# Altium PCB 锁生活(1.0mm).PcbDoc
Units mm, origin at the board's own origin, x right, y up, seen from the top; angles counter-clockwise.
Board outline 45 x 80 mm, 2 copper layers (Top Layer, Bottom Layer), stack 0.98 mm thick; 54 components, 35 nets, 172 pads, 102 vias.
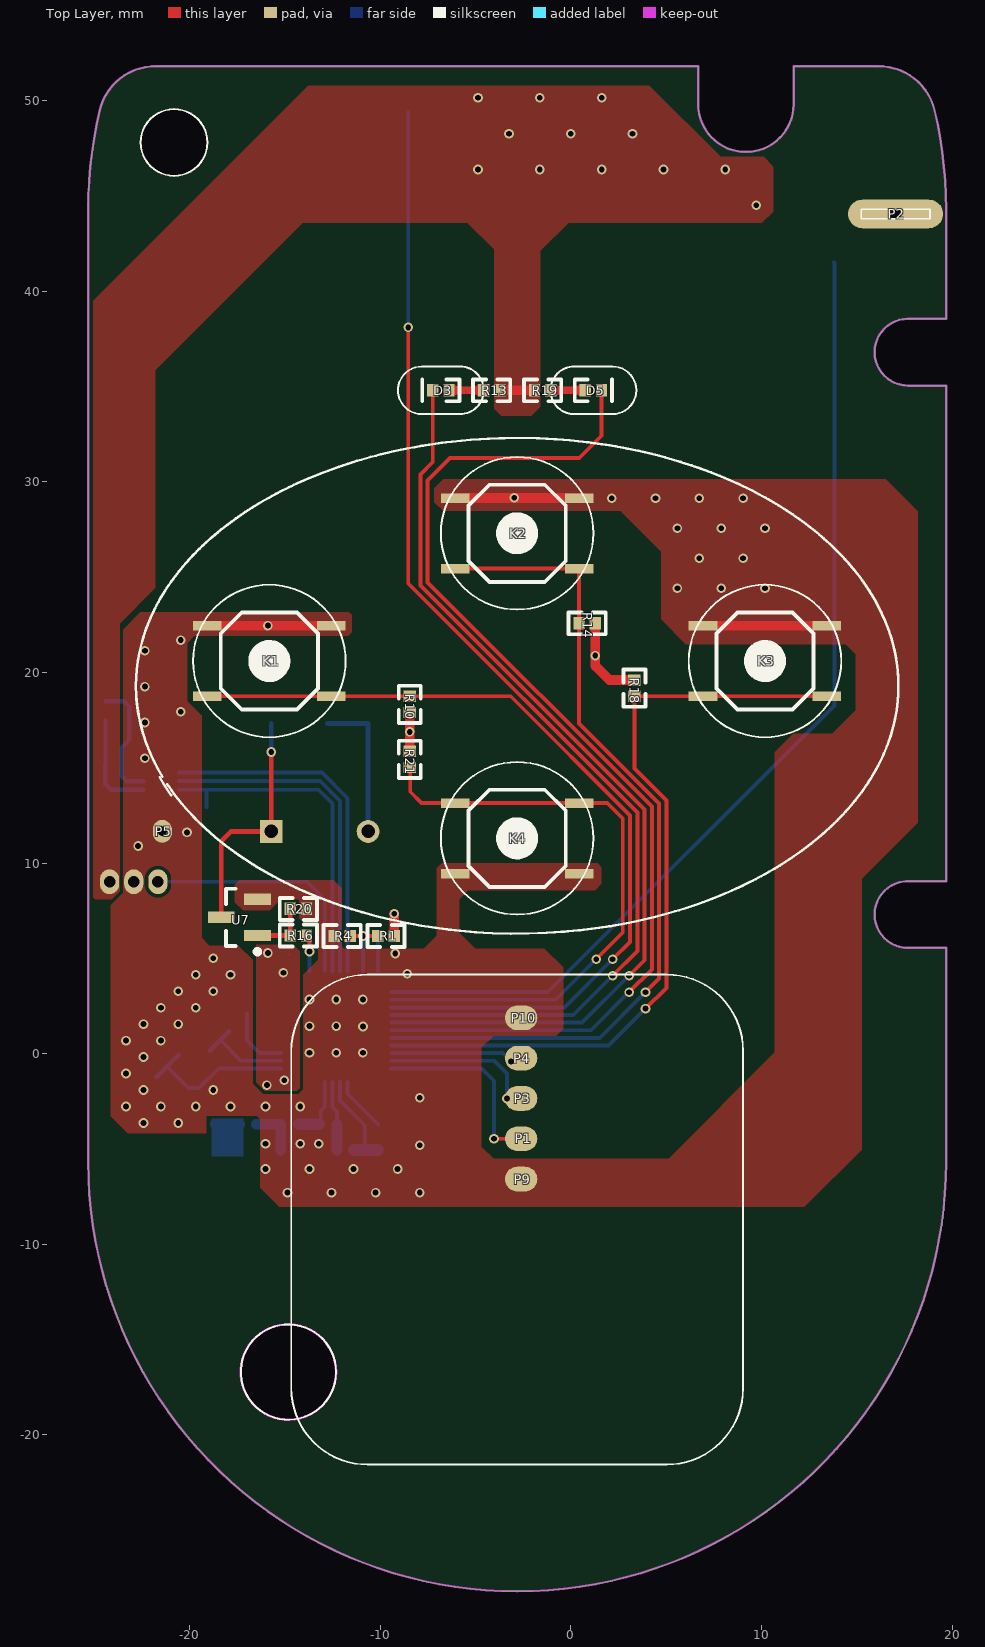
[diagram p0: Top Layer view]
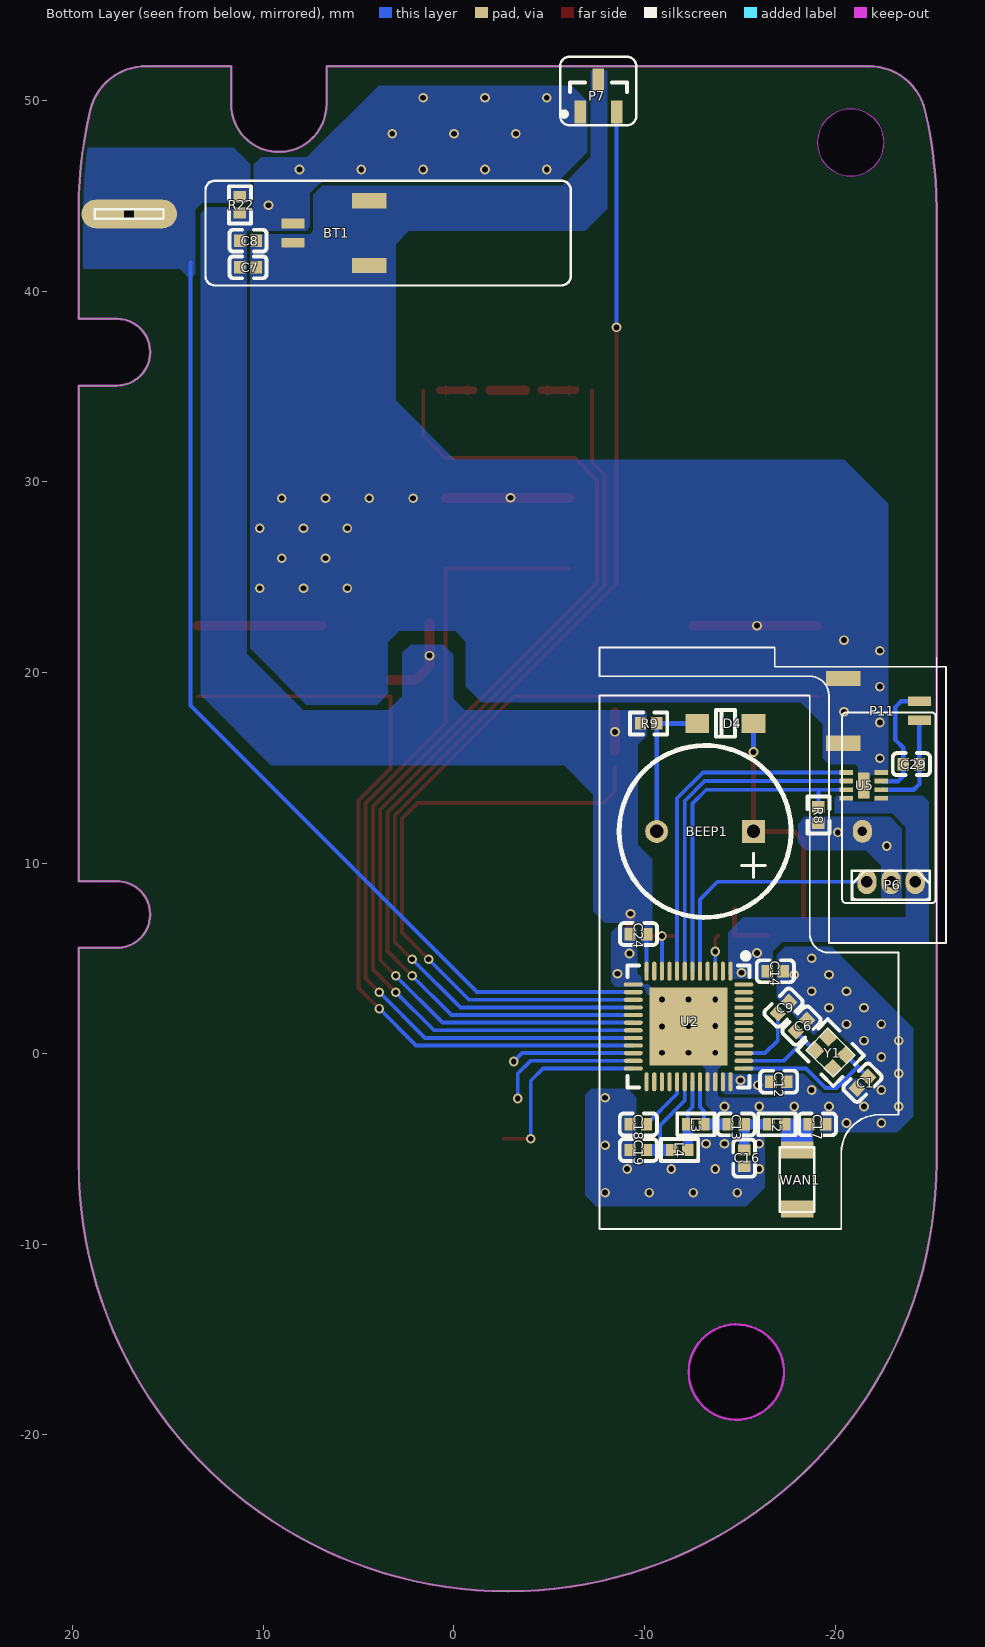
[diagram p1: Bottom Layer view, seen from below]
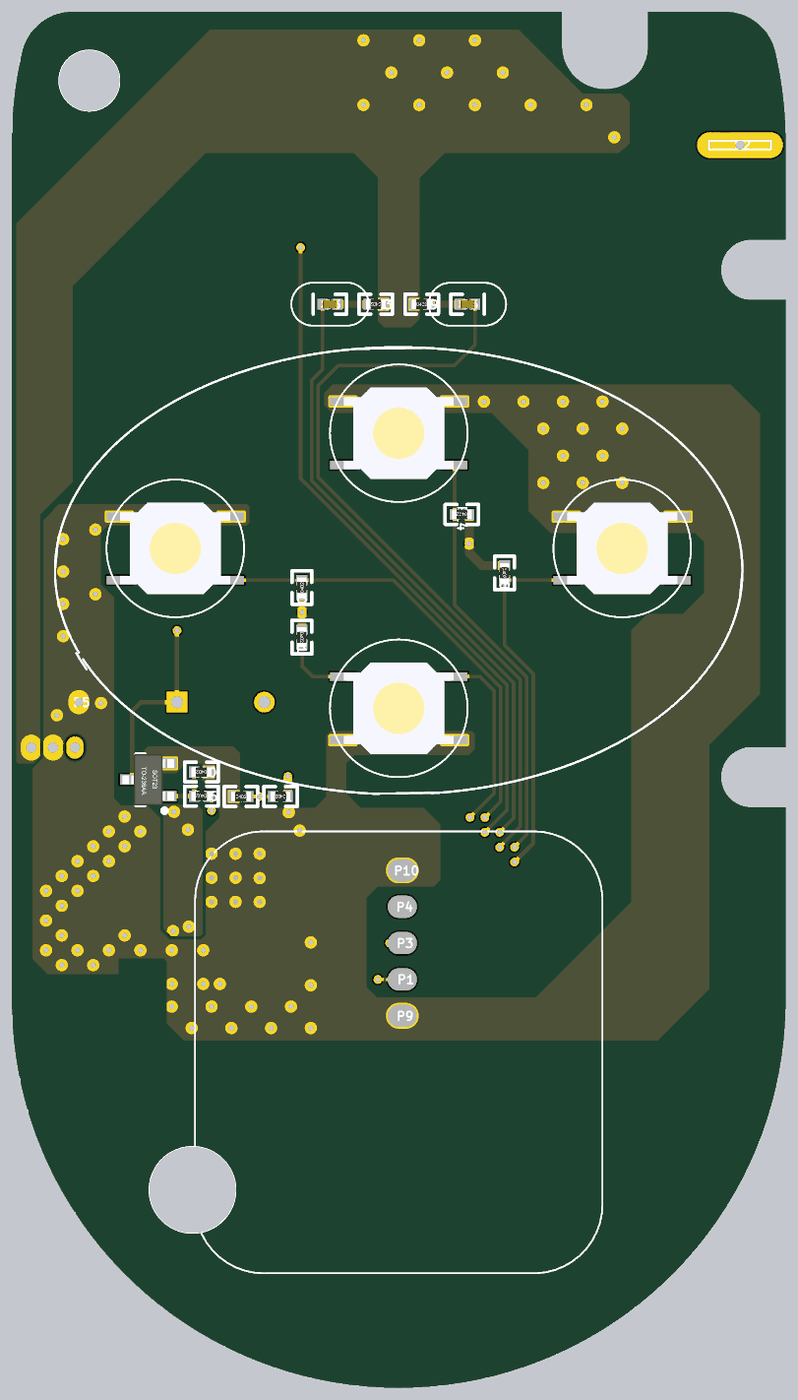
[diagram p2: 3D render of the assembled board from above, using the file's embedded part models]
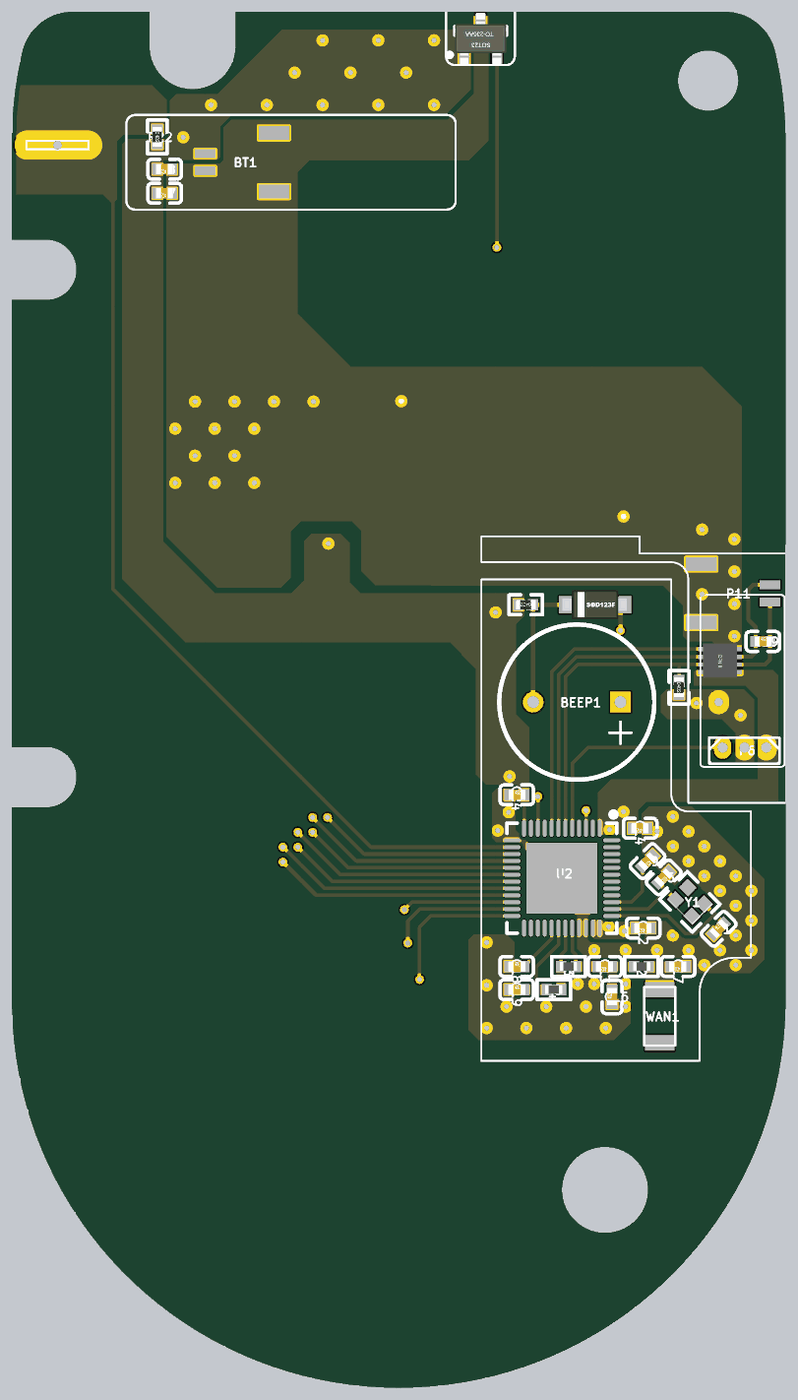
[diagram p3: 3D render of the assembled board from below, using the file's embedded part models]

## Layer stack, top to bottom
Top Solder: solder mask 0.0102, Solder Resist, Dk 3.5
Top Layer: signal copper 0.0356
Dielectric 1: dielectric 0.9086, FR-4, Dk 4.8
Bottom Layer: signal copper 0.0356
Bottom Solder: solder mask 0.0102, Solder Resist, Dk 3.5

## Board outline
-25.324,-5.702 -25.324,44.298 cw(c-2.824,44.298) -24.716,49.49 cw(c-21.797,48.798) -21.797,51.798 6.676,51.798 6.676,49.798 ccw(c9.176,49.798) 11.676,49.798 11.676,51.798 16.15,51.798 cw(c16.15,48.798) 19.069,49.49 cw(c-2.824,44.298) 19.676,44.298 19.676,38.548 17.676,38.548 ccw(c17.676,36.798) 17.676,35.048 19.676,35.048 19.676,9.048 17.676,9.048 ccw(c17.676,7.298) 17.676,5.548 19.676,5.548 19.676,-5.702 cw(c-2.824,-5.702)
cut-out: -14.824,-19.202 cw(c-14.824,-16.702) -17.324,-16.702 cw(c-14.824,-16.702) -14.824,-14.202 cw(c-14.824,-16.702) -12.324,-16.702 cw(c-14.824,-16.702)
cut-out: -20.824,46.048 cw(c-20.824,47.798) -22.574,47.798 cw(c-20.824,47.798) -20.824,49.548 cw(c-20.824,47.798) -19.074,47.798 cw(c-20.824,47.798)

## Design rules (kind name [scope] priority, off if disabled: settings)
Clearance [All] p1: gap=0.178 ignorepadtopadclearanceinfootprint=FALSE
PolygonConnect [All] p1: connectstyle=Direct reliefconductorwidth=0.254 reliefentries=4 polygonreliefangle="90 Angle" airgapwidth=0.254
RoutingVias [All] p1: holewidth=0.711 width=1.27 viastyle="Through Hole" minholewidth=0.711 minwidth=1.27 maxholewidth=0.711 maxwidth=1.27
SolderMaskExpansion [All] p1: expansion=0.102
Width [All] p1: maxlimit=1.27 minlimit=0.203 preferedwidth=0.254
30 further rules are at their usual default settings.

## Components (designator, comment, footprint, x,y, rotation, side; value= is the part's Value field where it differs from the comment)
BEEP1 "BEEP" BELL-φ5 -13.183,11.659 r0 bottom
BT1 "BATTERY" 2P-1.0卧贴连接器 8.433,43.548 r270 bottom
C1 "6pF" 0402_C -21.438,-1.524 r135 bottom
C6 "6pF" 0402_C -18.237,1.473 r315 bottom
C7 "10uF" 0402_C 10.795,41.25 r0 bottom
C8 "100nF" 0402_C 10.795,42.647 r0 bottom
C9 "100nF" 0402_C -17.297,2.413 r315 bottom
C12 "100nF" 0402_C -17.043,-1.473 r0 bottom
C13 "2.2pF" 0402_C -14.808,-3.708 r0 bottom
C14 "100nF" 0402_C -16.866,4.325 r0 bottom
C16 "0.8pF" 0402_C -15.233,-5.48 r90 bottom
C17 "1.5pF" 0402_C -19.075,-3.708 r0 bottom
C18 "47nF" 0402_C -9.684,-3.708 r180 bottom
C19 "2.2nF" 0402_C -9.684,-5.055 r180 bottom
C24 "100nF" 0402_C -9.69,6.274 r180 bottom
C29 "10uF" LC-0402_C -24.003,15.189 r180 bottom
D3 "BLUE-LED" 0402_LED -6.824,34.798 r0 top
D4 "Diode" SOD-123F -14.248,17.323 r180 bottom
D5 "RED-LED" 0402_LED 1.176,34.798 r180 top
K1 "KEY" KEY_SMT4x4x1.5 -15.824,20.598 r180 top
K2 "KEY" KEY_SMT4x4x1.5 -2.824,27.298 r180 top
K3 "KEY" KEY_SMT4x4x1.5 10.176,20.598 r180 top
K4 "KEY" KEY_SMT4x4x1.5 -2.824,11.298 r0 top
L2 "3.3nH" 0402_L -16.942,-3.708 r180 bottom
L3 "5.6nH" 0402_L -12.7,-3.708 r0 bottom
L4 "10nH" 0402_L -11.85,-5.055 r0 bottom
P1 "SWDCLK" 1P#1 -2.616,-4.464 r270 top
P2 "KEY5" 1P#2 17.026,44.048 r180 top
P3 "SWDIO" 1P#1 -2.616,-2.349 r270 top
P4 "RX" 1P#3 -2.616,-0.235 r180 top
P5 "GND" 1P#4 -21.436,11.661 r0 top
P6 "Holzer" Holzer -21.666,9.017 r180 bottom
P7 "Holzer" SOT23-3#1 -7.588,50.241 r90 bottom
P9 "GND" 1P#3 -2.616,-6.579 r180 top
P10 "GND" 1P#1 -2.616,1.88 r90 top
P11 "Motor" 2P-1.0卧贴连接器 -24.422,17.485 r90 bottom
R1 "100K" 0402_R -9.703,6.172 r180 top
R4 "100K" 0402_R -12.002,6.172 r0 top
R8 "10K" LC-0402_R -19.126,12.522 r270 bottom
R9 "30R" 0402_R -10.218,17.323 r0 bottom
R10 "10K" LC-0402_R -8.458,18.323 r90 top
R13 "510R" LC-0402_R -4.157,34.798 r180 top
R14 "10K" LC-0402_R 0.851,22.574 r180 top
R16 "1K" 0402_R -14.3,6.198 r180 top
R18 "10K" LC-0402_R 3.327,19.173 r270 top
R19 "510R" LC-0402_R -1.49,34.798 r0 top
R20 "10K" 0402_R -14.3,7.595 r180 top
R21 "10K" LC-0402_R -8.458,15.436 r270 top
R22 "10K" LC-0402_R 11.22,44.526 r270 bottom
U2 "nRF51822-QFAA" QFN-48_6x6x04P -12.315,1.425 r0 bottom
U5 "TT6238" DFN-8(2*2) -21.503,14.072 r0 bottom
U7 "N_MOS" SOT23-3#2 -17.399,7.148 r180 top
WAN1 "陶瓷天线" 陶瓷天线 -18.009,-6.605 r90 bottom
Y1 "32M" XT-2016 -19.761,0.051 r225 bottom

## Footprints (in the part's own frame and the unit in brackets; to place one, negate y for a bottom-side part, rotate by r counter-clockwise, add the part's x,y. Pads: shape width x height; smd on the part's side, far side on the other; paste and mask are expansions set on the pad)
1P#1 [mm] "single pad"
  oval 1.3x1.7 smd: 1(0,0)
1P#2 [mm] "single pad"
  oval 5x1.5 hole 0.5 square: 1(0,0)
1P#3 [mm] "single pad"
  oval 1.7x1.3 smd: 1(0,0)
1P#4 [mm] "single pad"
  oval 1x1.2 hole 0.5: 1(0,0)
2P-1.0卧贴连接器 [mm]
  rect 0.8x1.8 smd: 0(-1.2,4) 0(2.2,4)
  rect 0.5x1.2 smd: 1(0,0) 2(1,0)
0402_C [mm]
  rect 0.6x0.65 smd mask+0.051: 1(-0.425,0) 2(0.425,0)
  silkscreen extent -0.98,-0.58 0.97,0.58, body extent -0.48,-0.3 0.52,0.3, height 0.2
0402_L [mm]
  rect 0.6x0.65 smd mask+0.051: 1(-0.425,0) 2(0.425,0)
  silkscreen extent -0.98,-0.58 0.97,0.58, body extent -0.49,-0.26 0.52,0.26, height 0.36
0402_LED [mm]
  rect 0.6x0.65 smd mask+0.051: A(0.425,0) K(-0.425,0)
  silkscreen extent -0.98,-0.58 0.97,0.57, body extent -0.5,-0.25 0.5,0.25, height 0.45
0402_R [mm]
  rect 0.6x0.65 smd mask+0.051: 1(-0.425,0) 2(0.425,0)
  silkscreen extent -0.97,-0.58 0.97,0.57, body extent -0.57,-0.27 0.57,0.28, height 0.41
BELL-φ5 [mm]
  rect 1.2x1.2 hole 0.7: 1(-2.54,0)
  round 1.2 hole 0.7: 2(2.54,0)
  silkscreen extent -4.51,-4.51 4.51,4.51, body extent -4.53,-4.43 4.53,4.63, height 5
DFN-8(2*2) [mm]
  rect 0.7x0.25 smd paste+0: 1(-0.925,0.675) 2(-0.925,0.225) 3(-0.925,-0.225) 4(-0.925,-0.675) 5(0.925,-0.675) 6(0.925,-0.225) 7(0.925,0.225) 8(0.925,0.675)
  rect 0.61x1.35 smd paste+0: 4(-0.011,0)
  body extent -1.01,-1 0.99,1, height 0.75
Holzer [mm]
  oval 1x1.3 hole 0.6 paste+0: 1(2.54,0) 2(0,0) 3(1.27,0)
  silkscreen extent -0.78,-0.93 3.31,0.59, body extent -0.78,-1 3.31,0.52, height 4.57
KEY_SMT4x4x1.5 [mm]
  rect 1.5x0.5 smd: 1(-3.25,1.85) 1(3.25,1.85) 2(-3.25,-1.85) 2(3.25,-1.85)
  silkscreen extent -2.55,-2.55 2.55,2.55, body extent -3.2,-2.65 3.2,2.65, height 1.5
LC-0402_C [mm]
  rect 0.6x0.65 smd mask+0.051: 1(-0.425,0) 2(0.425,0)
  silkscreen extent -0.98,-0.58 0.97,0.58, body extent -0.48,-0.3 0.52,0.3, height 0.2
LC-0402_R [mm]
  rect 0.6x0.65 smd mask+0.051: 1(-0.425,0) 2(0.425,0)
  silkscreen extent -0.97,-0.58 0.97,0.57, body extent -0.57,-0.27 0.58,0.28, height 0.41
QFN-48_6x6x04P [mm]
  oval 0.22x1 smd mask+0.051: 1(-2.2,-2.9) 2(-1.8,-2.9) 3(-1.4,-2.9) 4(-1,-2.9) 5(-0.6,-2.9) 6(-0.2,-2.9) 7(0.2,-2.9) 8(0.6,-2.9) 9(1,-2.9) 10(1.4,-2.9) 11(1.8,-2.9) 12(2.2,-2.9) 25(2.2,2.9) 26(1.8,2.9) 27(1.4,2.9) 28(1,2.9) 29(0.6,2.9) 30(0.2,2.9) 31(-0.2,2.9) 32(-0.6,2.9) 33(-1,2.9) 34(-1.4,2.9) 35(-1.8,2.9) 36(-2.2,2.9)
  oval 1x0.22 smd mask+0.051: 13(2.9,-2.2) 14(2.9,-1.8) 15(2.9,-1.4) 16(2.9,-1) 17(2.9,-0.6) 18(2.9,-0.2) 19(2.9,0.2) 20(2.9,0.6) 21(2.9,1) 22(2.9,1.4) 23(2.9,1.8) 24(2.9,2.2) 37(-2.9,2.2) 38(-2.9,1.8) 39(-2.9,1.4) 40(-2.9,1) 41(-2.9,0.6) 42(-2.9,0.2) 43(-2.9,-0.2) 44(-2.9,-0.6) 45(-2.9,-1) 46(-2.9,-1.4) 47(-2.9,-1.8) 48(-2.9,-2.2)
  rect 4.1x4.1 smd mask+0.051: 49(0,0)
  silkscreen extent -3.2,-3.85 3.2,3.2, body extent -3.06,-3.06 3.06,3.06, height 1
SOD-123F [mm]
  rect 1.25x1 smd: 1(-1.475,0) 2(1.475,0)
  silkscreen extent -0.5,-0.7 0.5,0.7, body extent -1.9,-0.85 1.85,0.85, height 1.2
SOT23-3#1 [mm] "SOT23, 3-Leads, Body 3.0x2.5mm (max), Pitch 0.95mm, IPC Medium Density"
  rect 1.2x0.6 smd: 1(-0.85,0.95) 2(-0.85,-0.95) 3(0.85,0)
  silkscreen extent -1.07,-1.5 0.7,1.93, body extent -1.5,-1.5 1.5,1.5, height 1.3
SOT23-3#2 [mm] "SOT23, 3-Leads, Body 3.0x2.5mm (max), Pitch 0.95mm, IPC Medium Density"
  rect 1.4x0.6 smd: 1(-0.95,0.95) 2(-0.95,-0.95) 3(0.95,0)
  silkscreen extent -1.08,-1.5 0.7,1.92, body extent -1.5,-1.5 1.5,1.5, height 1.3
XT-2016 [mm]
  rect 0.75x0.7 smd: 1(-0.675,-0.5) 2(0.675,0.5) 3(0.675,-0.5) 4(-0.675,0.5)
  silkscreen extent -1.35,-1.14 1.35,1.14, body extent -1,-0.8 1,0.8, height 0.65
陶瓷天线 [mm]
  rect 0.9x1.7 smd: 1(1.55,0) 2(-1.55,0)
  silkscreen extent -1.7,-0.9 1.7,0.9, body extent -1.7,-0.9 1.7,0.9, height 1.4

## Part data
BEEP1: "蜂鸣器"
BT1: "电池"
C1 C6 C7 C8 C9 C12 C13 C14 C16 C17 C18 C19 C24 C29: library part Cap, "Capacitor", LatestRevisionDate=17-Jul-2002, LatestRevisionNote="Re-released for DXP Platform.", PackageDescription="Radial Cap, Thru-Hole; 2 Leads; 0.3 in Pin Spacing", PackageReference=RAD-0.3, Published=8-Jun-2000, Publisher="Altium Limited"
D3 D5: library part LED, "Typical RED, GREEN, YELLOW, AMBER GaAs LED", PackageDocument=Feb-2002, LatestRevisionDate=17-Jul-2002, LatestRevisionNote="Re-released for DXP Platform.", PackageReference=3.2X1.6X1.1, Published=8-Jun-2000, Publisher="Altium Limited"
D4: "diode", PackageDocument=Feb-2002, LatestRevisionDate=17-Jul-2002, LatestRevisionNote="Re-released for DXP Platform.", PackageReference=3.2X1.6X1.1, Published=8-Jun-2000, Publisher="Altium Limited"
L2 L3 L4: library part L
P1 P2 P3 P4 P5 P9 P10: library part "Header 1", "Header, 1-Pin", LatestRevisionDate=17-Jul-2002, LatestRevisionNote="Re-released for DXP Platform.", Publisher="Altium Limited"
P11: "电机"
R1 R4 R8 R9 R10 R13 R14 R16 R18 R19 R20 R21 R22: library part Res, "Resistor", LatestRevisionDate=17-Jul-2002, LatestRevisionNote="Re-released for DXP Platform.", PackageDescription="Axial Device, Thru-Hole; 2 Leads; 0.4 in Pin Spacing", PackageReference=AXIAL-0.4, Published=8-Jun-2000, Publisher="Altium Limited"
U2: "Multi-protocol Bluetooth Low Energy and 2.4GHz proprietary system-on-chip", Manufacturer="Nordic Semiconductor", Part Number=nRF51822-Q48-6x6_DCDC, Artikkelnr Noca=15079200, LatestRevisionDate=2012-07-10, Manufacturer Part Number=nRF51822-QFAA, Note="nRF51822 - QFN48 6x6 0.4mm pitch", Pin Count=48, Published=2012-07-08, Publisher="Nordic Semiconductor", Supplier="Nordic Semiconductor"
U5: library part TT6237
Y1: library part XTAL, "Crystal Oscillator", LatestRevisionDate=17-Jul-2002, LatestRevisionNote="Re-released for DXP Platform.", Published=8-Jun-2000, Publisher="Altium Limited"
P6 P7: LatestRevisionDate=17-Jul-2002, LatestRevisionNote="Re-released for DXP Platform.", Publisher="Altium Limited"

## Via types
v1: diameter 0.508, hole 0.305, Top Layer to Bottom Layer, 102 vias

## Nets (pads, with @x,y where several pads share a name; then routed paths per layer and width w, separated by ;. In a path a pad name is that pad's centre, name@x,y a point inside that pad or via, vN(x,y) a via of type N, cw(c..) or ccw(c..) an arc to the next point about the centre after c; other vN are vias at no path point)
+3V: BT1.1 C7.2 C8.2 C12.2 C14.2 C24.2 P6.1 P7.1 R1.1 R9.2 R10.1 R13.1 R14.1 R18.1 R19.1 R21.1 R22.2 U2.1 U2.12 U2.35 U2.36 U5.1 U5.8 | length 11.6
  Top Layer w0.508: R1.1 -9.271,6.179 v1(-9.271,7.341) ; R21.1 v1(-8.458,16.88) R10.1 ; R13.1 R19.1 ; R14.1 1.276,20.339 2.018,19.598 R18.1
  Bottom Layer w0.203: U2.12 C24.2
  other v1: -15.951,-1.651 -15.037,-1.397 -15.088,4.242 -15.9,5.283 1.27,20.879 9.715,44.501 -4.877,46.38 -1.634,46.38 1.609,46.38 4.851,46.38 8.094,46.38 -3.255,48.26 -0.013,48.26 3.23,48.26 -4.877,50.14 -1.634,50.14 1.609,50.14
AD_BAT: R1.2 R4.2 U2.10 | length 3.3
  Top Layer w0.203: R4.2 v1(-10.915,6.172) R1.2
  Bottom Layer w0.203: U2.10 v1(-10.915,6.172)
ANT: C17.2 L2.2 WAN1.1 | length 1.3
  Bottom Layer w0.559: C17.2 L2.2
ANT1: L3.2 L4.1 U2.31 | length 3.7
  Bottom Layer w0.203: U2.31 -12.515,-2.802 -12.275,-3.041 L3.2
  Bottom Layer w0.559: L4.1 L3.2
ANT2: C13.2 L3.1 U2.32 | length 3.3
  Bottom Layer w0.203: L3.1@-13.125,-3.625 -13.125,-3.016 -12.915,-2.805 U2.32
  Bottom Layer w0.61: C13.2@-14.275,-3.708 L3.1@-13.208,-3.708
BEEP: R16.1 U2.3 | length 1.9
  Top Layer w0.203: R16.1 -13.716,6.038 v1(-13.716,5.359)
  Bottom Layer w0.203: v1(-13.716,5.359) -13.716,4.327 U2.3
BLUE_LED: D3.K U2.18 | length 49.7
  Top Layer w0.203: D3.K -7.249,31.029 -7.899,30.378 -7.899,24.567 3.861,12.807 3.861,4.902 v1(3.048,4.089)
  Bottom Layer w0.203: U2.18 0.584,1.625 v1(3.048,4.089)
DEC1: C9.2 U2.39 | length 3.5
  Bottom Layer w0.203: C9.2 -16.997,0.69 -16.332,0.025 U2.39
DEC2: C18.2 U2.29 | length 2.9
  Bottom Layer w0.203: U2.29 -11.715,-2.103 C18.2
DJ+: U2.8 U5.5 | length 18.5
  Bottom Layer w0.203: U5.5 -13.065,14.747 -11.715,13.396 U2.8
DJ-: U2.7 U5.6 | length 17.8
  Bottom Layer w0.203: U5.6 -13.154,14.297 -12.115,13.258 U2.7
EN_motor: R8.1 U2.6 U5.7 | length 18.1
  Bottom Layer w0.203: U5.7 -19.126,13.847 ; R8.1 -19.126,13.847 ; U2.6 -12.515,13.119 -13.242,13.847 -19.126,13.847
GND: BT1.0 BT1.2 C1.1 C6.1 C7.1 C8.1 C9.1 C12.1 C14.1 C16.1 C17.1 C18.1 C19.1 C24.1 K1.2 K2.2 K3.2 K4.2 P5.1 P6.3 P7.3 P9.1 P10.1 P11.0 R4.1 R8.2 R20.1 U2.13 U2.33 U2.34 U2.49 U5.4 U7.2 | length 19.5
  Top Layer w0.508: K1.2@-19.074,22.448 K1.2@-12.574,22.448 ; K2.2@-6.074,29.148 K2.2@0.426,29.148 ; K3.2@6.926,22.448 K3.2@13.426,22.448
  other v1: -14.872,-7.29 -12.56,-7.29 -10.249,-7.29 -7.938,-7.29 -16.027,-6.045 -13.716,-6.045 -11.405,-6.045 -9.093,-6.045 -7.938,-4.801 -16.027,-4.724 -14.199,-4.724 -13.233,-4.724 -22.428,-3.632 -20.599,-3.632 -23.343,-2.769 -21.514,-2.769 -19.685,-2.769 -17.856,-2.769 -16.027,-2.769 -14.199,-2.769 -7.938,-2.311 -22.428,-1.905 -18.771,-1.905 -23.343,-1.041 -22.428,-0.178 -13.716,0.045 -12.316,0.045 -10.916,0.045 -23.343,0.686 -21.514,0.686 -10.915,1.425 -13.716,1.445 -12.316,1.445 -22.428,1.549 -20.599,1.549 -21.514,2.413 -19.685,2.413 -13.716,2.845 -12.316,2.845 -10.916,2.845 -20.599,3.277 -18.771,3.277 -19.685,4.14 -17.856,4.14 -8.585,4.191 -18.771,5.004 -9.22,5.258 -22.708,10.897 -20.142,11.608 -22.352,15.494 -22.352,17.374 -20.472,17.932 -22.352,19.253 -22.352,21.133 -20.472,21.692 -15.9,22.454 5.582,24.409 7.88,24.409 10.179,24.409 6.731,25.984 9.03,25.984 5.582,27.559 7.88,27.559 10.179,27.559 2.134,29.134 4.432,29.134 6.731,29.134 9.03,29.134 -2.972,29.159
Holzer1: P6.2 U2.5 | length 12.9
  Bottom Layer w0.203: P6.2 -13.843,9.017 -12.915,8.089 U2.5
Holzer2: P7.2 U2.17 | length 63.3
  Top Layer w0.203: v1(-8.534,38.1) -8.534,24.663 3.48,12.649 3.48,5.385 v1(2.184,4.089)
  Bottom Layer w0.203: U2.17 0.12,2.025 v1(2.184,4.089) ; P7.2 -8.538,38.104 v1(-8.534,38.1)
KEY1: K1.1 R10.2 U2.16 | length 45.3
  Top Layer w0.203: K1.1@-19.074,18.748 -12.574,18.748 R10.2 -3.157,18.748 3.099,12.491 3.099,5.867 v1(2.184,4.953)
  Bottom Layer w0.203: U2.16 -0.343,2.425 v1(2.184,4.953)
KEY2: K2.1 R14.2 U2.20 | length 45.1
  Top Layer w0.203: K2.1@-6.074,25.448 0.426,25.448 R14.2 0.426,17.319 4.623,13.123 4.623,3.937 v1(3.912,3.226)
  Bottom Layer w0.203: U2.20 1.511,0.825 v1(3.912,3.226)
KEY3: K3.1 R18.2 U2.21 | length 41.8
  Top Layer w0.203: v1(3.912,2.362) 5.004,3.454 5.004,13.28 3.327,14.957 R18.2 6.926,18.748 K3.1@13.426,18.748
  Bottom Layer w0.203: U2.21 1.975,0.425 v1(3.912,2.362)
KEY4: K4.1 R21.2 U2.15 | length 32.6
  Top Layer w0.203: R21.2 -8.433,14.986 -8.433,13.741 -7.839,13.148 -6.074,13.148 0.426,13.148 1.904,13.148 2.718,12.334 2.718,6.35 v1(1.321,4.953)
  Bottom Layer w0.203: U2.15 -0.807,2.825 v1(1.321,4.953)
KEY5: P2.1 R22.1 U2.14 | length 52.7
  Bottom Layer w0.203: U2.14 -1.22,3.225 13.818,18.263 13.818,41.478 13.792,41.504
NetBEEP1_1: BEEP1.1 D4.2 U7.3 | length 12.5
  Top Layer w0.254: U7.3 -18.349,11.14 -17.831,11.659 BEEP1.1 v1(-15.723,15.824)
  Bottom Layer w0.254: v1(-15.723,15.824) D4.2
NetBEEP1_2: BEEP1.2 D4.1 R9.1 | length 7.8
  Bottom Layer w0.254: D4.1 R9.1 BEEP1.2
NetC13_1: C13.1 C16.2 L2.1 | length 2.6
  Bottom Layer w0.559: L2.1 C13.1 C16.2
NetC29_1: C29.1 P11.2 U5.3 | length 6.5
  Bottom Layer w0.229: P11.2 -23.463,18.485 -23.165,18.186 -23.165,16.459 -23.578,16.046 C29.1 -23.578,14.598 -23.597,14.58 -23.314,14.297 U5.3
NetC29_2: C29.2 P11.1 U5.2 | length 5.5
  Bottom Layer w0.229: P11.1 -24.422,15.196 C29.2 -24.428,14.141 -24.134,13.847 U5.2
NetD3_A: D3.A R13.2 | length 1.8
  Top Layer w0.381: D3.A R13.2
NetD5_A: D5.A R19.2 | length 1.8
  Top Layer w0.381: R19.2 D5.A
NetR16_2: R16.2 R20.2 U7.1 | length 3.1
  Top Layer w0.254: U7.1 R16.2 R20.2
RED_LED: D5.K U2.19 | length 58
  Top Layer w0.203: D5.K 1.601,32.411 0.432,31.242 -6.35,31.242 -7.518,30.074 -7.518,24.725 4.242,12.965 4.242,4.42 v1(3.048,3.226)
  Bottom Layer w0.203: U2.19 1.048,1.225 v1(3.048,3.226)
RX: P4.1 U2.22 | length 6.4
  Bottom Layer w0.203: U2.22 -3.581,0.025 v1(-3.15,-0.406)
SWDCLK: P1.1 U2.24 | length 10.1
  Top Layer w0.203: v1(-4.039,-4.464) P1.1
  Bottom Layer w0.203: U2.24 -4.686,-0.775 -4.039,-1.422 v1(-4.039,-4.464)
SWDIO: P3.1 U2.23 | length 7.6
  Bottom Layer w0.203: U2.23 -4.02,-0.375 -3.353,-1.041 v1(-3.353,-2.349)
VDD_PA: C19.2 L4.2 U2.30 | length 5.4
  Bottom Layer w0.203: U2.30 -12.115,-2.465 -10.82,-3.759 -10.82,-5.055
  Bottom Layer w0.61: L4.2@-11.4,-5.055 -10.82,-5.055 C19.2@-10.135,-5.055
XC1: C1.2 U2.37 Y1.2 | length 8.5
  Bottom Layer w0.203: -21.194,-0.675 -20.066,-1.803 -19.507,-1.803 -18.478,-0.775 U2.37
  Bottom Layer w0.254: C1.2 -21.738,-1.219 -21.194,-0.675 Y1.2
XC2: C6.2 U2.38 Y1.1 | length 5
  Bottom Layer w0.203: -18.392,0.713 -17.304,-0.375 U2.38
  Bottom Layer w0.254: Y1.1 -18.392,0.713 -17.937,1.168 C6.2
pads on no net: U2.2 U2.4 U2.9 U2.11 U2.25 U2.26 U2.27 U2.28 U2.40 U2.41 U2.42 U2.43 U2.44 U2.45 U2.46 U2.47 U2.48 WAN1.2 Y1.3 Y1.4

## Polygon pours and split planes (outlines as drawn)
GND on Bottom Layer "Bottom Layer-No Net" (solid, pour order 10): -23.495,8.153 -22.428,8.153 -22.428,9.855 -21.615,10.668 -18.466,10.668 -18.059,11.074 -18.059,12.065 -18.415,12.421 -22.885,12.421 -23.495,11.811
GND on Bottom Layer "Bottom Layer-No Net" (solid, pour order 4): -9.576,-2.286 -9.119,-1.829 -7.214,-1.829 -6.883,-2.159 -6.883,-7.417 -7.468,-8.001 -15.342,-8.001 -16.307,-7.036 -16.307,-4.216 -15.748,-4.216 -15.748,-5.588 -14.732,-5.588 -14.732,-4.216 -12.751,-4.216 -12.751,-5.563 -9.576,-5.563
+3V on Bottom Layer "Bottom Layer-No Net" (solid, pour order 8): -24.917,13.208 -24.587,13.538 -22.073,13.538 -22.073,13.259 -22.022,13.208 -20.98,13.208 -20.93,13.259 -20.93,13.538 -20.091,13.538 -19.99,13.437 -19.99,12.624 -23.003,12.624 -23.698,11.887 -23.698,7.163 -15.189,7.163 -14.402,6.375 -14.402,4.14 -14.605,3.937 -16.688,3.937 -16.739,3.988 -16.739,5.385 -17.221,5.867 -24.917,5.867
GND on Bottom Layer "Bottom Layer-No Net" (solid, pour order 6): -13.208,-0.813 -12.979,-0.584 -12.979,-0.432 -14.072,-0.432 -14.072,-0.584 -13.843,-0.813 -13.843,-2.184 -13.97,-2.311 -16.891,-2.311 -17.145,-2.057 -17.145,-0.991 -18.362,-0.991 -19.403,-2.032 -20.193,-2.032 -21.006,-1.219 -21.057,-1.219 -21.742,-1.905 -22.454,-1.194 -19.583,1.676 -18.885,0.978 -16.942,2.921 -16.942,5.156 -17.399,5.613 -19.837,5.613 -24.105,1.346 -24.105,-3.277 -23.266,-4.115 -19.202,-4.115 -19.202,-3.251 -19.152,-3.2 -13.716,-3.2 -13.208,-2.692
+3V on Bottom Layer "Bottom Layer-No Net" (solid, pour order 2): -16.916,-1.143 -16.866,-1.092 -14.732,-1.092 -14.63,-0.991 -14.072,-0.991 -13.995,-1.067 -13.995,-1.905 -14.224,-2.134 -16.789,-2.134 -16.916,-2.007
KEY5 on Bottom Layer "Top Layer-No Net" (solid, remove dead copper, pour order 0): 13.55,41.173 13.55,40.882 13.767,40.665 13.868,40.665 14.376,41.173 14.783,41.173 19.676,41.173 19.676,46.194 19.685,47.269 19.431,47.523 11.532,47.523 10.668,46.66 10.668,44.78 10.82,44.628 13.208,44.628 13.55,44.285
GND on Bottom Layer "Bottom Layer-No Net" (solid, pour order 14): -9.627,6.553 -9.627,4.216 -10.414,3.429 -10.414,2.87 -9.855,3.429 -8.56,3.429 -8.255,3.734 -8.255,6.375 -8.509,6.629 -9.55,6.629
GND on Bottom Layer "Bottom Layer-No Net" (solid, pour order 16): -5.677,45.529 6.896,45.529 7.366,45.06 7.366,43.18 7.569,42.977 10.69,42.977 10.69,21.256 7.747,18.313 4.013,18.313 3.454,18.872 3.454,21.59 2.87,22.174 -0.076,22.174 -0.635,21.615 -0.635,19.279 -1.473,18.44 -18.199,18.428 -19.355,17.272 -19.355,15.494 -19.66,15.189 -21.057,15.189 -21.209,15.037 -21.209,13.411 -21.819,13.411 -21.819,14.529 -21.92,14.63 -22.784,14.63 -22.784,28.854 -20.472,31.166 -0.051,31.166 3.048,34.265 3.048,42.469 2.362,43.155 -6.883,43.155 -8.052,44.323 -8.052,51.587 -7.95,51.689 -7.315,51.689 -7.188,51.562 -7.188,47.041
GND on Bottom Layer "Bottom Layer-No Net" (solid, pour order 26): 3.048,45.441 3.048,40.564 3.226,40.386 10.693,40.386 10.693,42.977 7.569,42.977 7.366,43.18 7.366,45.212 7.137,45.441
+3V on Bottom Layer "Bottom Layer-No Net" (solid, pour order 22): 7.708,47.015 10.109,47.015 10.592,46.533 10.592,44.552 10.744,44.399 10.922,44.399 12.954,44.399 13.284,44.069 13.284,18.821 9.601,15.138 -5.791,15.138 -7.315,13.589 -7.315,7.468 -7.925,6.858 -9.677,6.858 -9.804,6.731 -9.804,5.791 -10.008,5.588 -10.211,5.588 -10.414,5.791 -10.414,10.185 -9.652,10.947 -9.652,16.205 -10.135,16.688 -10.135,17.907 -10.033,18.009 -0.584,18.009 0.025,18.618 0.025,20.93 0.559,21.463 2.261,21.463 2.692,21.031 2.692,18.745 3.429,18.009 7.899,18.009 10.871,20.98 10.871,43.129 10.82,43.18 7.747,43.18 7.544,43.383 7.544,44.272 7.547,45.133 6.909,45.771 -5.486,45.771 -7.061,47.346 -7.061,49.911 -6.198,50.775 3.949,50.775
+3V on Top Layer "Bottom Layer-No Net" (solid, pour order 18): -14.375,-1.956 -14.375,-1.952 -14.224,-1.805 -14.224,5.385 -14.554,5.715 -16.51,5.715 -16.51,-1.499 -16.053,-1.956
GND on Top Layer "Bottom Layer-No Net" (solid, pour order 12): -17.628,8.865 -17.399,9.093 -12.446,9.093 -12.054,8.701 -12.054,8.484 -12.054,5.654 -11.913,5.512 -7.722,5.512 -7.036,6.198 -7.036,9.728 -6.782,9.982 1.397,9.982 1.6,9.779 1.6,8.915 1.27,8.585 -5.385,8.585 -5.867,8.103 -5.867,6.35 -5.029,5.512 -1.397,5.512 -0.406,4.521 -0.406,1.295 -0.762,0.94 -4.064,0.94 -4.699,0.305 -4.699,-4.877 -4.064,-5.512 5.117,-5.512 10.693,0.065 10.693,15.824 11.659,16.789 13.716,16.789 14.935,18.009 14.935,20.955 14.402,21.488 6.02,21.488 4.724,22.784 4.724,26.34 2.591,28.473 -6.706,28.473 -7.163,28.931 -7.163,29.667 -6.706,30.124 16.51,30.124 18.186,28.448 18.186,12.116 15.24,9.169 15.24,-5.029 12.243,-8.026 -1.524,-8.026 -15.316,-8.026 -16.307,-7.036 -16.307,-4.089 -16.307,-3.429 -16.485,-3.251 -19.126,-3.251 -19.126,-4.166 -23.241,-4.166 -24.13,-3.277 -24.13,5.664 -24.13,7.798 -23.495,8.433 -23.495,17.704 -23.495,22.25 -22.606,23.165 -11.659,23.165 -11.506,23.012 -11.506,22.098 -11.684,21.92 -19.761,21.92 -20.142,21.539 -20.142,21.006 -20.142,18.491 -19.38,17.729 -19.38,6.071 -18.974,5.664 -17.45,5.664 -16.705,4.919 -16.705,-1.583 -16.154,-2.134 -14.3,-2.134 -14.046,-1.88 -14.046,4.14 -13.267,4.919 -13.267,7.01 -14.166,7.01 -14.249,7.094 -14.249,8.097 -15.22,8.097 -15.799,7.518 -17.196,7.518 -17.628,7.95
+3V on Top Layer "Bottom Layer-No Net" (solid, pour order 20): -5.436,43.586 -4.039,42.189 -4.039,33.833 -3.658,33.452 -2.083,33.452 -1.6,33.934 -1.6,42.113 -0.127,43.586 10.008,43.586 10.617,44.171 10.617,46.533 10.109,47.041 7.849,47.041 4.115,50.775 -13.792,50.775 -25.07,39.497 -25.07,27.534 -25.07,8.204 -24.968,8.103 -24.079,8.103 -23.673,8.509 -23.673,22.555 -21.797,24.431 -21.797,35.861 -14.072,43.586

## Keep-outs
Keep-Out Layer:
  circle w0.127: c-14.824,-16.702 r2.5
  lines w0.127: -25.324,-5.702 ccw(c-2.824,-5.702) 19.676,-5.702 19.676,5.548 17.676,5.548 cw(c17.676,7.298) 17.676,9.048 19.676,9.048 19.676,35.048 17.676,35.048 cw(c17.676,36.798) 17.676,38.548 19.676,38.548 19.676,44.298 ccw(c-2.824,44.298) 19.069,49.49 ccw(c16.15,48.798) 16.15,51.798 11.676,51.798 11.676,49.798 cw(c9.176,49.798) 6.676,49.798 6.676,51.798 -21.797,51.798 ccw(c-21.797,48.798) -24.716,49.49 ccw(c-2.824,44.298) -25.324,44.298 -25.324,-5.702

## Other copper
Bottom Layer:
  region net ANT: -17.17,-3.404 -18.847,-3.404 -18.847,-5.385 -17.17,-5.385

## Silkscreen, mask and mechanical layers (free items; w line width, h text height)
Top Overlay:
  drawing of 761 lines, arcs and shapes, not listed
Bottom Overlay:
  lines w0.013: -25.324,5.798 -25.324,20.798
  lines w0.1: -25.824,5.798 -25.824,20.298 -16.837,20.298 -16.837,21.298 -7.637,21.298 -7.637,19.798 -18.674,19.798 ccw(c-18.674,18.798) -19.674,18.798 -19.674,5.798 -25.824,5.798 ; -25.274,8.098 ccw(c-25.074,8.098) -25.074,7.898 -20.574,7.898 ccw(c-20.574,8.098) -20.374,8.098 -20.374,17.698 ccw(c-20.574,17.698) -20.574,17.898 -25.074,17.898 ccw(c-25.074,17.698) -25.274,17.698 -25.274,8.098 ; -23.324,-3.202 -22.324,-3.202 cw(c-22.324,-5.202) -20.324,-5.202 -20.324,-9.202 -7.637,-9.202 -7.637,18.798 -18.674,18.798 -18.674,6.298 cw(c-19.674,6.298) -19.674,5.298 -23.324,5.298 -23.324,-3.202
  lines w0.127: -24.974,8.078 -20.884,8.078 ; -24.974,8.078 -24.974,9.598 ; -24.974,8.078 -24.974,9.598 ; -24.974,8.078 -20.884,8.078 ; -24.974,9.598 -20.884,9.598 ; -24.974,9.598 -20.884,9.598 ; -20.884,8.078 -20.884,9.598 ; -20.884,8.078 -20.884,9.598 ; -9.574,49.198 ccw(c-9.074,49.198) -9.074,48.698 -6.074,48.698 ccw(c-6.074,49.198) -5.574,49.198 -5.574,51.798 ccw(c-6.074,51.798) -6.074,52.298 -9.074,52.298 ccw(c-9.074,51.798) -9.574,51.798 -9.574,49.198 ; -6.137,40.798 ccw(c-5.637,40.798) -5.637,40.298 -3.137,40.298 1.863,40.298 8.363,40.298 12.526,40.298 ccw(c12.526,40.798) 13.026,40.798 13.026,45.298 ccw(c12.526,45.298) 12.526,45.798 -5.637,45.798 ccw(c-5.637,45.298) -6.137,45.298 -6.137,40.798 ; 15.226,43.798 18.826,43.798 18.826,44.298 15.226,44.298 15.226,43.798
Mechanical 1:
  circle w0.127: c-14.824,-16.702 r2.5
  circle w0.127: c-20.824,47.798 r1.75
  lines w0.127: -25.324,-5.702 ccw(c-2.824,-5.702) 19.676,-5.702 19.676,5.548 17.676,5.548 cw(c17.676,7.298) 17.676,9.048 19.676,9.048 19.676,35.048 17.676,35.048 cw(c17.676,36.798) 17.676,38.548 19.676,38.548 19.676,44.298 ccw(c-2.824,44.298) 19.069,49.49 ccw(c16.15,48.798) 16.15,51.798 11.676,51.798 11.676,49.798 cw(c9.176,49.798) 6.676,49.798 6.676,51.798 -21.797,51.798 ccw(c-21.797,48.798) -24.716,49.49 ccw(c-2.824,44.298) -25.324,44.298 -25.324,-5.702
Mechanical 13:
  lines w0.013: -9.574,49.198 ccw(c-9.074,49.198) -9.074,48.698 -6.074,48.698 ccw(c-6.074,49.198) -5.574,49.198 -5.574,51.798 ccw(c-6.074,51.798) -6.074,52.298 -9.074,52.298 ccw(c-9.074,51.798) -9.574,51.798 -9.574,49.198 ; -6.137,40.798 ccw(c-5.637,40.798) -5.637,40.298 -3.137,40.298 1.863,40.298 8.363,40.298 12.526,40.298 ccw(c12.526,40.798) 13.026,40.798 13.026,45.298 ccw(c12.526,45.298) 12.526,45.798 -5.637,45.798 ccw(c-5.637,45.298) -6.137,45.298 -6.137,40.798